# Altium PCB Power&CH340G.PcbDoc
Units mil, origin at the board's own origin, x right, y up, seen from the top; angles counter-clockwise.
Board outline 1305 x 1310 mil, 2 copper layers (Top Layer, Bottom Layer); 22 components, 21 nets, 98 pads, 34 vias.
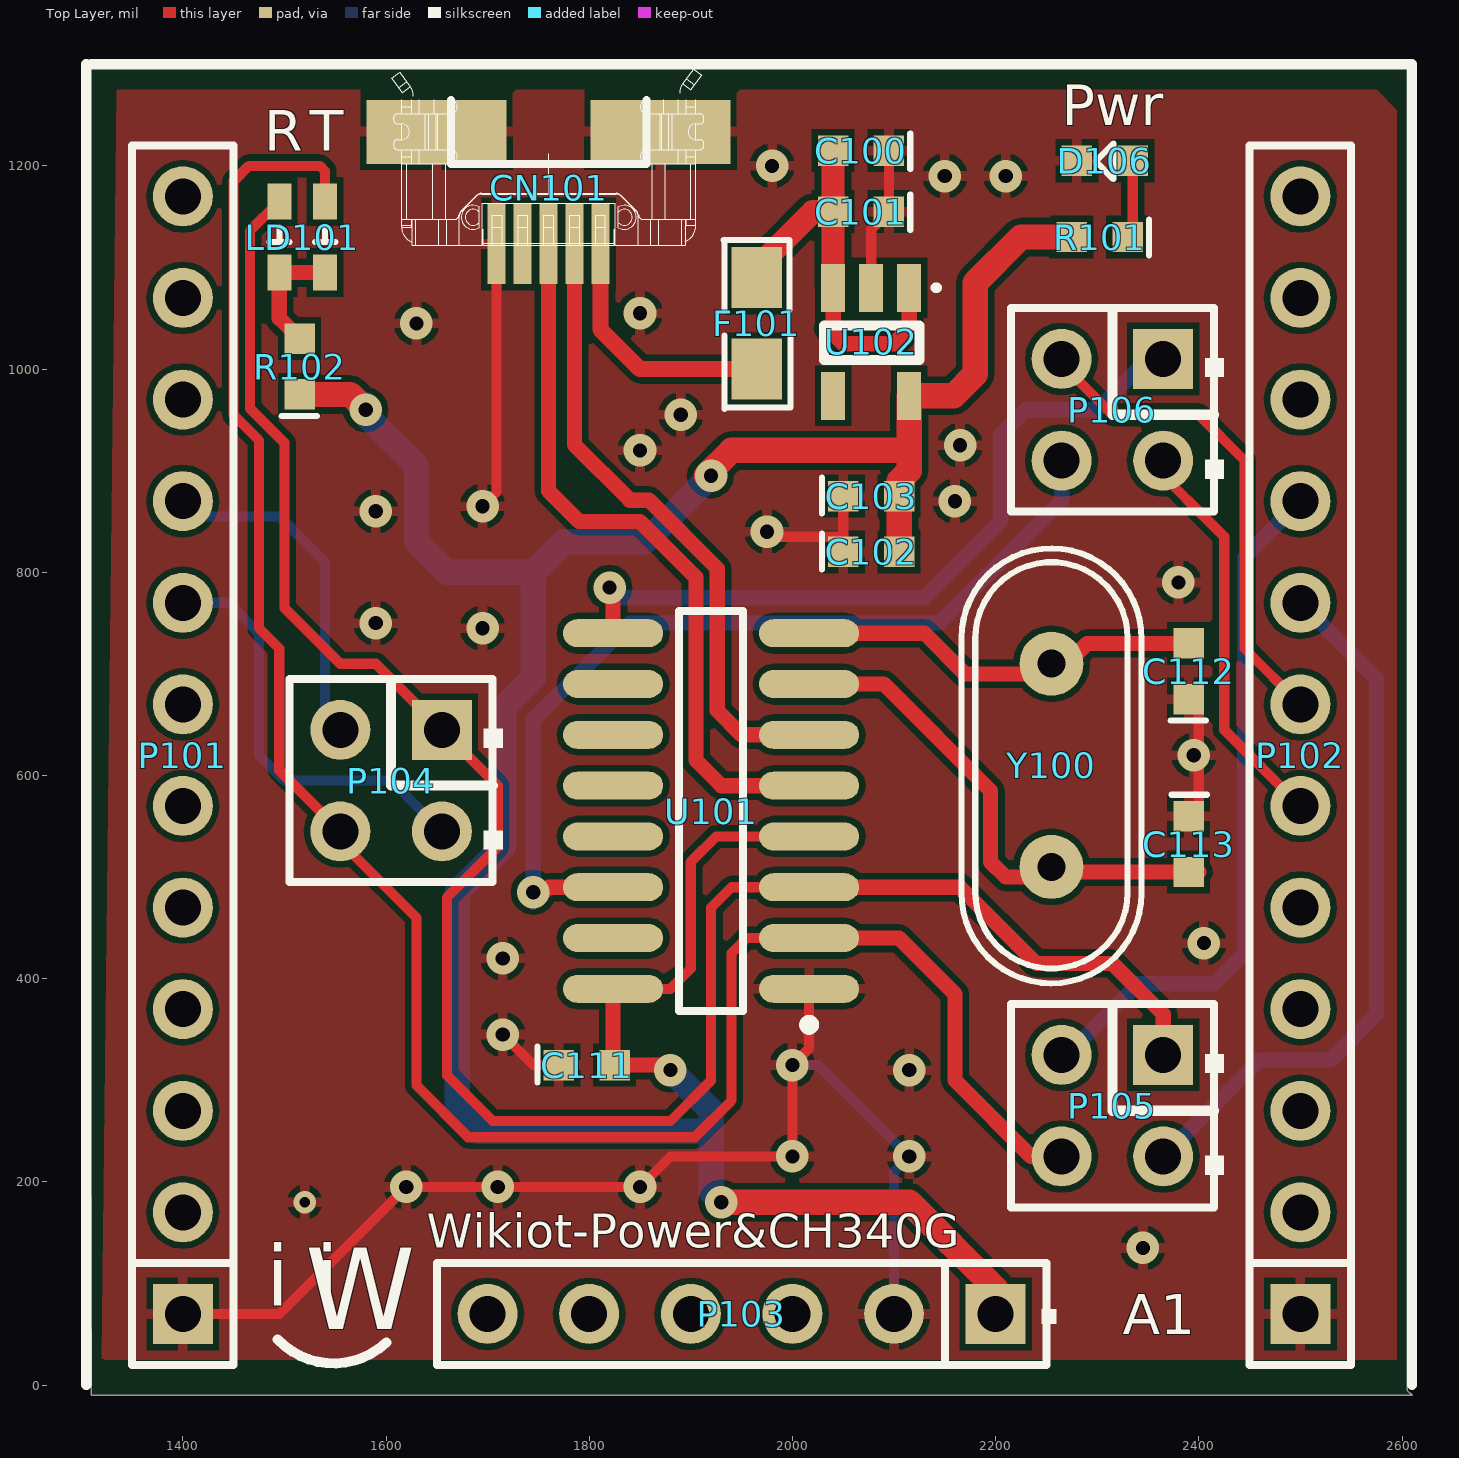
[diagram p0: Top Layer view]
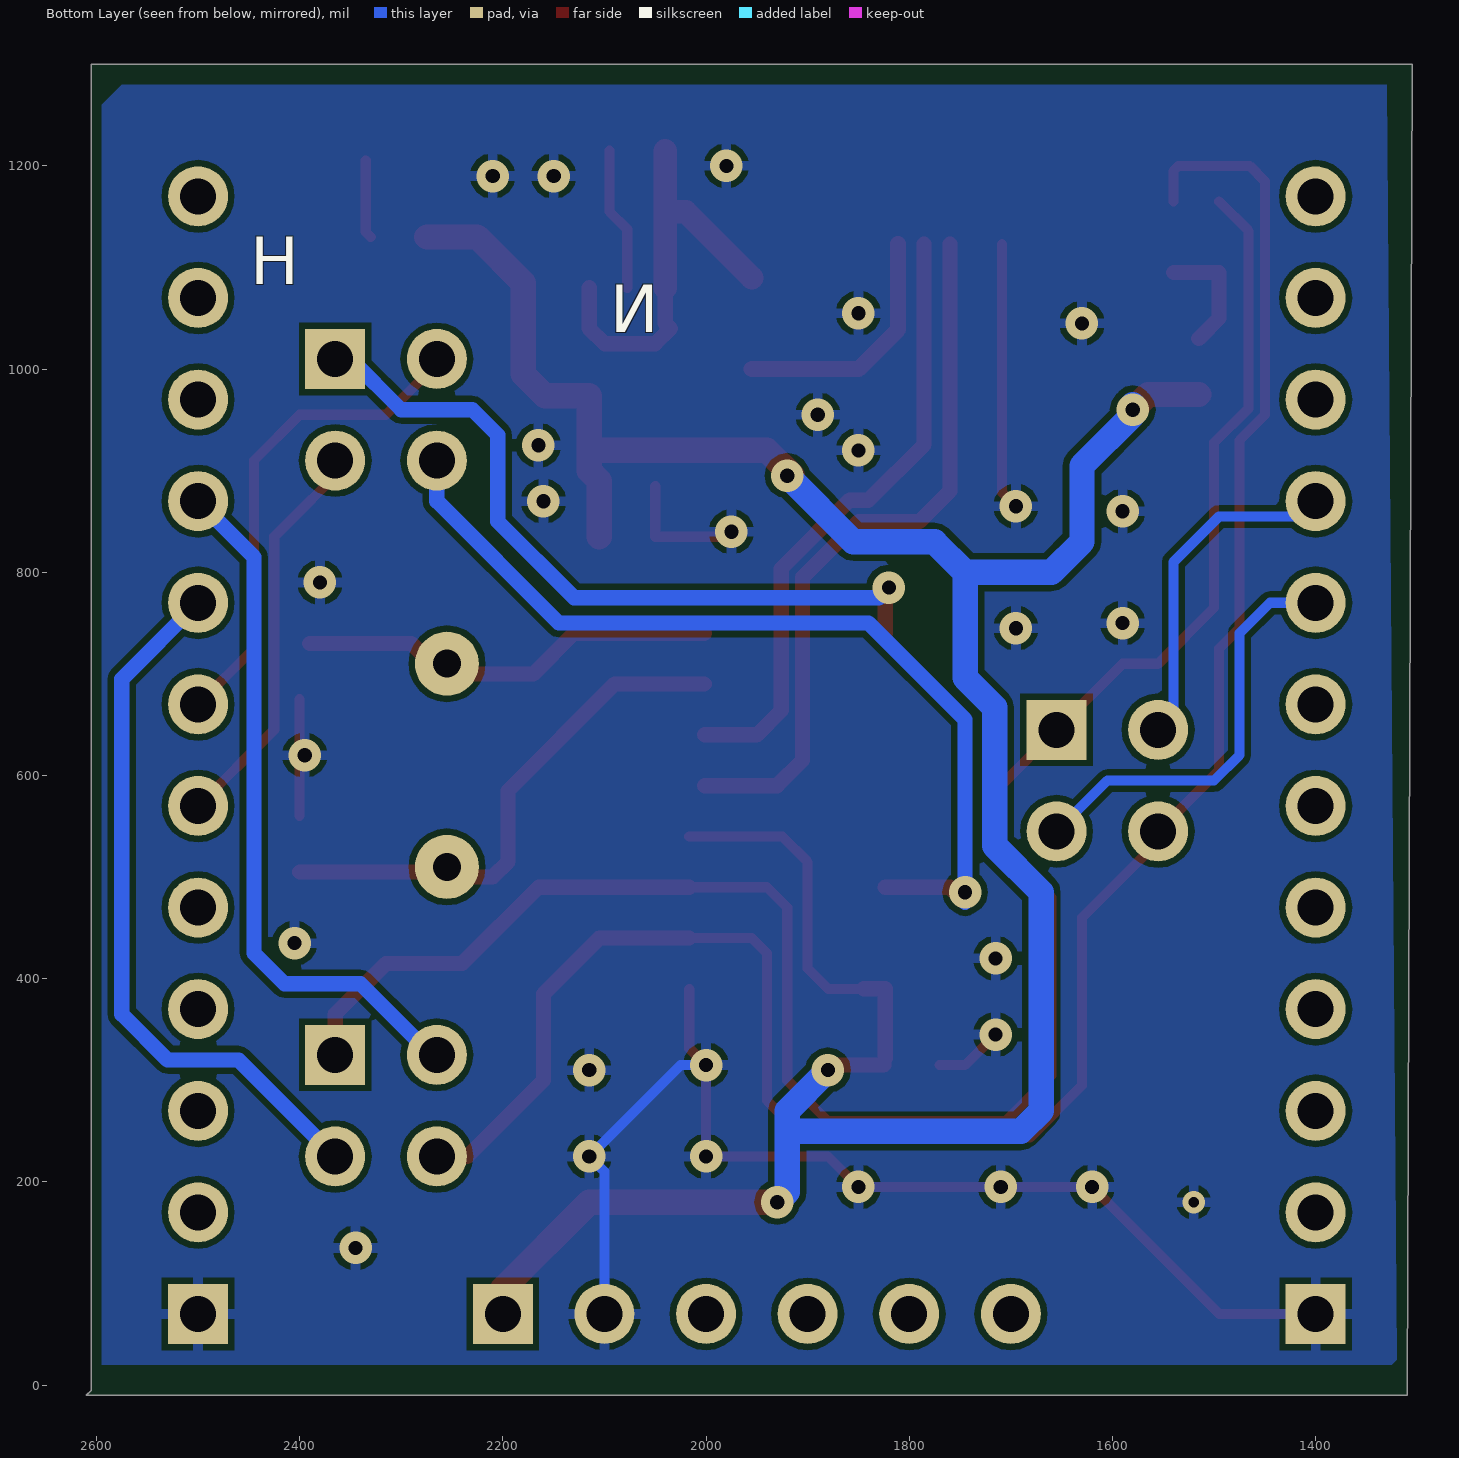
[diagram p1: Bottom Layer view, seen from below]

## Layer stack, top to bottom
Top Solder: solder mask 0.4, Solder Resist, Dk 3.5
Top Layer: signal copper 1.4
Dielectric1: dielectric 12.6, FR-4, Dk 4.8
Bottom Layer: signal copper 1.4
Bottom Solder: solder mask 0.4, Solder Resist, Dk 3.5

## Board outline
1305,1300 2605,1300 2605,-5 2610,-10 1310,-10

## Design rules (kind name [scope] priority, off if disabled: settings)
Clearance [All] p1: gap=6
PolygonConnect [All] p1: connectstyle=Relief reliefconductorwidth=10 reliefentries=4 polygonreliefangle="90 Angle" airgapwidth=10
RoomDefinition Power&CH340G [InComponentClass('Power&CH340G')] p1: confinementstyle=ConfineIn formatcopy=TRUE lockcomponents=FALSE outline 2620,1295 1315,1295 1315,5 2620,5
RoutingVias [All] p1: holewidth=12 width=25 viastyle="Through Hole" minholewidth=12 minwidth=25 maxholewidth=28 maxwidth=50
SolderMaskExpansion [All] p1: expansion=4
Width [All] p1: maxlimit=55 minlimit=7 preferedwidth=10
29 further rules are at their usual default settings.

## Components (designator, comment, footprint, x,y, rotation, side; value= is the part's Value field where it differs from the comment)
C100 "1uF" 0603M 2095,1215 r180 top
C101 "0.1uF" 0603M 2095,1155 r180 top
C102 "1uF" 0603M 2050,820 r0 top
C103 "0.1uF" 0603M 2050,875 r0 top
C111 "0.1uF" 0603M 1770,315 r0 top
C112 "22pF" 0603M 2390,675 r90 top
C113 "22pF" 0603M 2390,560 r270 top
CN101 "USB-Micro" USB-MICRO-Female-Lite 1760,1230 r0 top
D106 "RED" 0603pn 2335,1205 r180 top
F101 "500mA" 0805 1965,1090 r270 top
LD101 "LTST-C195KGJRKT" 0805-LED-Bi 1520,1170 r270 top
P101 "Synio Header-L 12-Pin" HDR1X12 1400,70 r90 top
P102 "Synio Header-R 12-Pin" HDR1X12 2500,70 r90 top
P103 "Synio Power Header 6 Pin" HDR1X6/2.54MM 2200,70 r180 top
P104 "Header 2X2" HDR2X2/2.54MM 1655,645 r180 top
P105 "Header 2X2" HDR2X2/2.54MM 2365,325 r180 top
P106 "Header 2X2" HDR2X2/2.54MM 2365,1010 r180 top
R101 "1K" 0603M 2330,1130 r180 top
R102 "1K" 0603M 1515,975 r90 top
U101 "CH340G" SO16_M 1920,565 r180 top
U102 "LDO" SOT23-5 2115,1080 r180 top
Y100 "12MHz" XTAL_49S 2255,610 r90 top

## Footprints (in the part's own frame and the unit in brackets; to place one, negate y for a bottom-side part, rotate by r counter-clockwise, add the part's x,y. Pads: shape width x height; smd on the part's side, far side on the other; paste and mask are expansions set on the pad)
0603M [mil]
  rect 30x30 smd: 1(0,0) 2(55,0)
  silkscreen extent -21,-17 -21,18, body extent -5,-15 60,15, height 43
0603pn [mil]
  rect 30x30 smd: 1(0,0) 2(55,0)
  silkscreen extent 19,-17 36,18
0805 [mil]
  rect 60x50 smd: 1(0,0) 2(90,0)
  silkscreen extent -37,-33 129,33
0805-LED-Bi [mm]
  rect 0.9x0.6 smd: 1(0.127,-0.635) 2(0.127,0.508) 3(1.905,0.508) 4(1.905,-0.635)
  silkscreen extent 0.76,-0.89 1.14,0.76, body extent 0.32,-1.02 1.72,0.9, height 1.1
HDR1X6/2.54MM [mm] "Connector; Header; 6 Position"
  rect 1.5x1.5 hole 0.9: 1(0,0)
  round 1.5 hole 0.9: 2(2.54,0) 3(5.08,0) 4(7.62,0) 5(10.16,0) 6(12.7,0)
  silkscreen extent -1.52,-1.27 13.97,1.27
HDR1X12 [mm] "Connector; Header; 12 Position"
  rect 1.5x1.5 hole 0.9: 1(0,0)
  round 1.5 hole 0.9: 2(2.54,0) 3(5.08,0) 4(7.62,0) 5(10.16,0) 6(12.7,0) 7(15.24,0) 8(17.78,0) 9(20.32,0) 10(22.86,0) 11(25.4,0) 12(27.94,0)
  silkscreen extent -1.27,-1.27 29.21,1.27
HDR2X2/2.54MM [mm] "Connector; Header; 2x2 Position"
  rect 1.5x1.5 hole 0.9: 1(0,0)
  round 1.5 hole 0.9: 2(0,2.54) 3(2.54,0) 4(2.54,2.54)
  silkscreen extent -1.52,-1.27 3.81,3.81
SO16_M [mm] "16-Pin Small Outline Integrated Circuit 1.27 mm Pitch, IPC Low Density"
  oval 2.5x0.7 smd: 1(-2.45,4.445) 2(-2.45,3.175) 3(-2.45,1.905) 4(-2.45,0.635) 5(-2.45,-0.635) 6(-2.45,-1.905) 7(-2.45,-3.175) 8(-2.45,-4.445) 9(2.45,-4.445) 10(2.45,-3.175) 11(2.45,-1.905) 12(2.45,-0.635) 13(2.45,0.635) 14(2.45,1.905) 15(2.45,3.175) 16(2.45,4.445)
  silkscreen extent -2.58,-5 0.8,5.47, body extent -2,-5 2,5, height 1.75
SOT23-5 [mm]
  rect 0.6x1.2 smd: 1(0,0) 2(0.95,0) 3(1.9,0) 4(1.9,2.7) 5(0,2.7)
  silkscreen extent -0.69,0 2.13,1.8, body extent -0.32,0.7 2.35,2.1, height 1.1
USB-MICRO-Female-Lite [mm] "Connector; USB2.0, Type B, SM; 5 Position; Right Angle"
  rect 3.5x1.6 smd: 0(-2.802,0.088) 0(2.798,0.088)
  rect 0.45x2 smd: 1(1.298,-2.714) 2(0.648,-2.714) 3(-0.002,-2.714) 4(-0.652,-2.714) 5(-1.302,-2.714)
  silkscreen extent -3.92,-2.74 3.88,1.65
XTAL_49S [mm] "Hole 1.6mm"
  round 1.6 hole 0.7: 1(2.54,0) 2(-2.54,0)
  silkscreen extent -5.45,-2.25 5.42,2.25

## Part data
C100 C101 C102 C103 C111 C112 C113: library part Cap, "Capacitor"
D106: library part LED0, "Typical INFRARED GaAs LED"
F101: library part "Fuse 1", "Fuse"
LD101: "Avago, HSMF-A203 Bi-Color LED"
P101: "Synio Header-L, 12-Pin"
P102: "Synio Header-R, 12-Pin"
P104 P105 P106: "Header, 2-Pin, Dual row"
R101 R102: library part Res2, "Resistor"
U101: "USB to UART IC"
U102: library part LDO-SOT23-5, "General LDO SOT23-5"
Y100: library part XTAL, "Crystal Oscillator"

## Via types
v1: diameter 32, hole 14, Top Layer to Bottom Layer, 33 vias
v2: diameter 22, hole 10, Top Layer to Bottom Layer, tented both sides, 1 vias

## Nets (pads, with @x,y where several pads share a name; then routed paths per layer and width w, separated by ;. In a path a pad name is that pad's centre, name@x,y a point inside that pad or via, vN(x,y) a via of type N, cw(c..) or ccw(c..) an arc to the next point about the centre after c; other vN are vias at no path point)
CH_CTS: P106.1 U101.9 | length 734.8
  Top Layer w15: v1(1820,785) 1823.54,781.46 U101.9
  Bottom Layer w15: v1@1815,790 v1(1820,785) 1830,775 2130,775 2205,850 2205,935 2230,960 2300,960 P106.1@2350,1010
CH_RTS: P106.4 U101.14 | length 909.7
  Top Layer w15: v1(1745,485) 1755,485 1760,490 U101.14
  Bottom Layer w15: v1@1745,475 1745,655 1840,750 2145,750 2265,870 P106.4
CH_RX: LD101.1 P104.1 P105.1 U101.3 | length 2024.6
  Top Layer w10: LD101.1 1466,1136 1466,961.5 1500,927.5 1500,765 1555,710 1590,710 P104.1 1710,590 1710,530 1660,480 1660,305 1705,260 1880,260 1920,300 1920,470 1940,490 U101.3
  Top Layer w15: U101.3 2165,490 2240,415 2315,415 2365,365 P105.1
CH_TX: LD101.2 P104.4 P105.4 U101.2 | length 2053.9
  Top Layer w10: LD101.2 1540,1195 1535,1200 1465,1200 1450,1185 1450,954.87 1475,929.87 1475,745 1495,725 1495,605 P104.4 1555,535 1630,460 1630,295 1681,244 1904,244 1940,280 1940,425 1955,440 U101.2
  Top Layer w15: U101.2 2105,440 2160,385 2160,300 2235,225 P105.4
CTS1: P102.7 P106.3 | length 497.7
  Top Layer w10: P106.3@2250,1010 P106.3@2257.5,1002.5 ; P106.3 2265,1005 2315,955 2400,955 2445,910 2445,725 P102.7
D3V3: C102.2 C103.2 C111.2 P103.1 R101.2 R102.1 U101.4 U101.16 U102.5 | length 2943.9
  Top Layer w10: U101.16@1845,390 1880,390 1900,410 1900,515 1925,540 U101.4
  Top Layer w15: C111.2@1823.54,321.46 U101.16 U101.16@1845,390 ; C111.2 1875,315 v1(1880,310)
  Top Layer w25: R102.1 1565,975 v1(1580,960) ; v1@1915,895 1940,920 2115,920 ; v1(1930,180) 2115,180 2200,95 P103.1 ; 2105,835 C103.2 2105,890 2115,900 2115,920 ; R101.2 2225,1130 2180,1085 2180,995 2158.7,973.7 U102.5 2115,920
  Bottom Layer w25: v1@1580,965 v1(1580,960) 1580,955 1630,905 1630,830 1660,800 1745,800 ; v1(1880,310) 1920,270 1920,255 ; v1(1920,895) 1855,830 1775,830 1745,800 ; v1(1930,180) 1920,190 1920,255 ; 1745,800 1745,696.16 1715.89,667.06 1715.89,530.89 1670,485 1670,270 1690,250 1915,250 1920,255
D5V: C100.2 C101.2 F101.1 U102.1 U102.3 | length 421.6
  Top Layer w15: U102.3 2040.2,1045.2 2035,1040 2050,1025 2100,1025 2115,1040 U102.1
  Top Layer w23: F101.1@1955,1090 2020,1155 C101.2 ; C100.2 C101.2 ; U102.3 2040,1080.2 C101.2
GND: C100.1 C101.1 C102.1 C103.1 C111.1 C112.1 C113.1 CN101.0 CN101.5 D106.2 P101.1 P102.1 P103.2 U101.1 U102.2 | length 1865.1
  Top Layer w10: P101.1 1495,70 v1(1620,195) v1(1710,195) v1(1850,195) 1880,225 v1(2000,225) v1(2000,315) 2016.46,331.46 U101.1 ; v1(1695,865) 1708.76,878.76 CN101.5 ; v1(1715,345) 1745,315 C111.1 ; v1(1975,840) 1980,835 2050,835 C103.1 C103.1@2050,885 ; U102.2 2077.6,1137.6 C101.1 C100.1 ; C113.1@2400,560 2400,620 C112.1@2400,675
  Bottom Layer w10: v1(2000,315) 2025,315 v1(2115,225) 2100,210 P103.2
  other v1: 2345,135 2115,310 1715,420 2405,435 2395,620 1695,745 1590,750 2380,790 1590,860 2160,870 1850,920 2165,925 1890,955 1630,1045 1850,1055 2150,1190 2210,1190 1980,1200
  other v2: 1520,180
NetC112_2: C112.2 U101.8 Y100.1 | length 398.4
  Top Layer w15: U101.8@2001.46,740 2130,740 2170,700 Y100.1@2255,700 ; Y100.1@2270,710 2290,730 C112.2
NetC113_2: C113.2 U101.7 Y100.2 | length 505.3
  Top Layer w15: U101.7@2001.46,690 2090,690 2195,585 2195,515 2210,500 Y100.2@2255,500 ; Y100.2@2270,510 2275,505 C113.2@2400,505
NetCN101_1: CN101.1 F101.2 | length 244.2
  Top Layer w16: CN101.1 1811.12,1038.88 1850,1000 F101.2@1955,1000
NetCN101_2: CN101.2 U101.6 | length 613.7
  Top Layer w15: CN101.2 1785.53,925.47 1840,871 1858.7,871 1926,803.7 1926,664 1950,640 U101.6@2001.46,640
NetCN101_3: CN101.3 U101.5 | length 710.2
  Top Layer w15: CN101.3 1759.94,880.06 1790,850 1850,850 1905,795 1905,615 1930,590 U101.5@2001.46,590
NetD106_1: D106.1 R101.1 | length 77.1
  Top Layer w10: R101.1 2335,1135 D106.1
NetLD101_3: LD101.3 LD101.4 R102.2 | length 118.3
  Top Layer w15: R102.2 1495,1050 LD101.4 LD101.3
NRST: P103.5
RTS1: P102.6 P106.2 | length 402.1
  Top Layer w10: P106.2@2350,910 2425,835 2425,645 P102.6
RX0: P101.9 P104.3 | length 336.1
  Bottom Layer w10: P101.9 1415,855 1495,855 1540,810 1540,660 P104.3
RX1: P102.9 P105.3 | length 689.2
  Bottom Layer w15: P105.3 2270,325 2340,395 2415,395 2445,425 2445,815 P102.9
TX0: P101.8 P104.2 | length 418.5
  Bottom Layer w10: P101.8 1445,770 1475,740 1475,620 1500,595 1605,595 P104.2
TX1: P102.8 P105.2 | length 704.1
  Bottom Layer w15: P105.2 2460,320 2530,320 2575,365 2575,695 P102.8
pads on no net: CN101.4 P101.2 P101.3 P101.4 P101.5 P101.6 P101.7 P101.10 P101.11 P101.12 P102.2 P102.3 P102.4 P102.5 P102.10 P102.11 P102.12 P103.3 P103.4 P103.6 U101.10 U101.11 U101.12 U101.13 U101.15 U102.4

## Polygon pours and split planes (outlines as drawn)
GND on Bottom Layer "Top Layer-No Net" (solid, remove dead copper, pour order 20): 1330,1280 2575,1280 2580,1275 2595,1260 2595,20 1325,20 1320,25
GND on Top Layer "Top Layer-No Net" (solid, remove dead copper, pour order 35): 1335,1275 2575,1275 2595,1255 2595,25 1325,25 1320,20

## Keep-outs
Keep-Out Layer:
  lines w10: 0,3905 3925,3905

## Silkscreen, mask and mechanical layers (free items; w line width, h text height)
Top Overlay:
  lines w10: 1305,0 1305,1300 ; 1310,1300 2610,1300 2610,0 ; 1493.34,45 ccw(c1548.34,97) 1600.34,42
  text "Pwr" at 2265,1240 h40
  text "R" at 1480,1215 h40
  text "T" at 1525,1215 h40
  text "Wikiot-Power&CH340G" at 1640,135 h33.46
  text "i i" at 1482.34,78 h60
  text "W" at 1520.34,55 h80
  text "A1" at 2325,50 h39.37
Bottom Overlay:
  text "H" at 2448.56,1068 h80
  text "N" at 2046.56,1021 h80